# Altium PCB DIOBoard1.PcbDoc
Units mil, origin at the board's own origin, x right, y up, seen from the top; angles counter-clockwise.
Board outline 3937.01 x 5905.51 mil, 2 copper layers (Top Layer, Bottom Layer); 9 components, 86 nets, 54 pads, 7 vias.
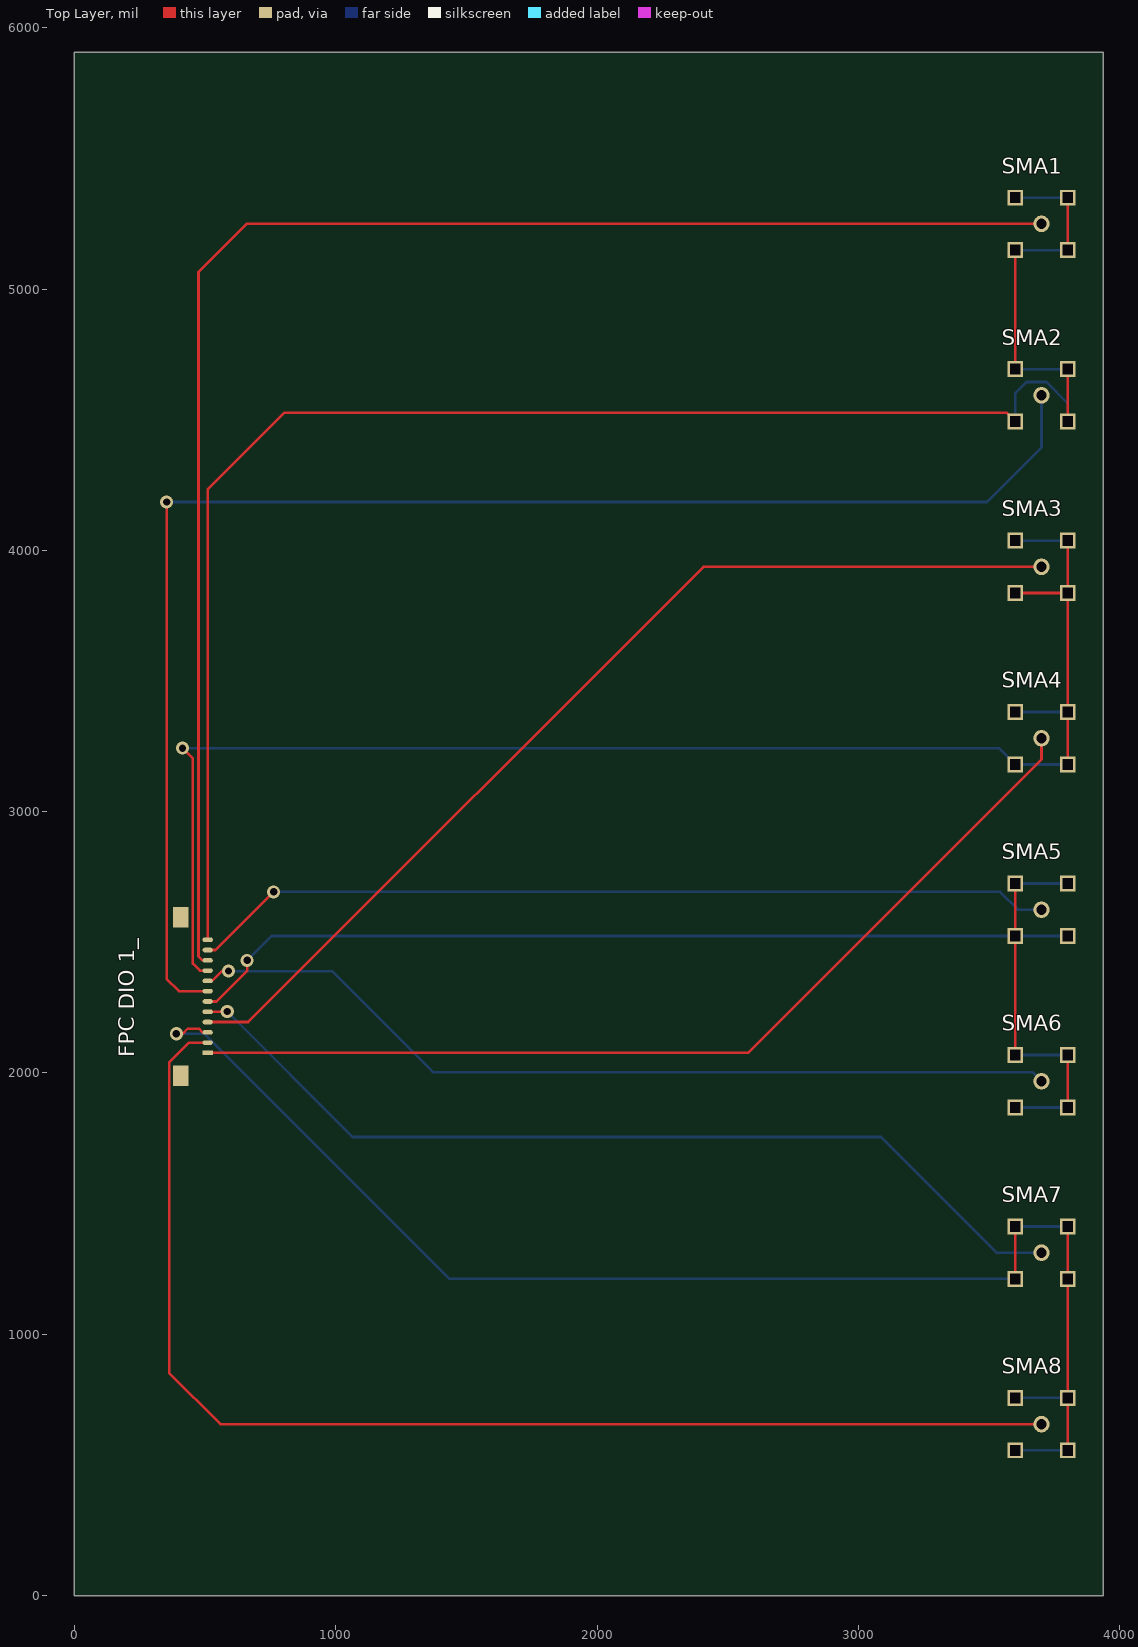
[diagram p0: Top Layer view]
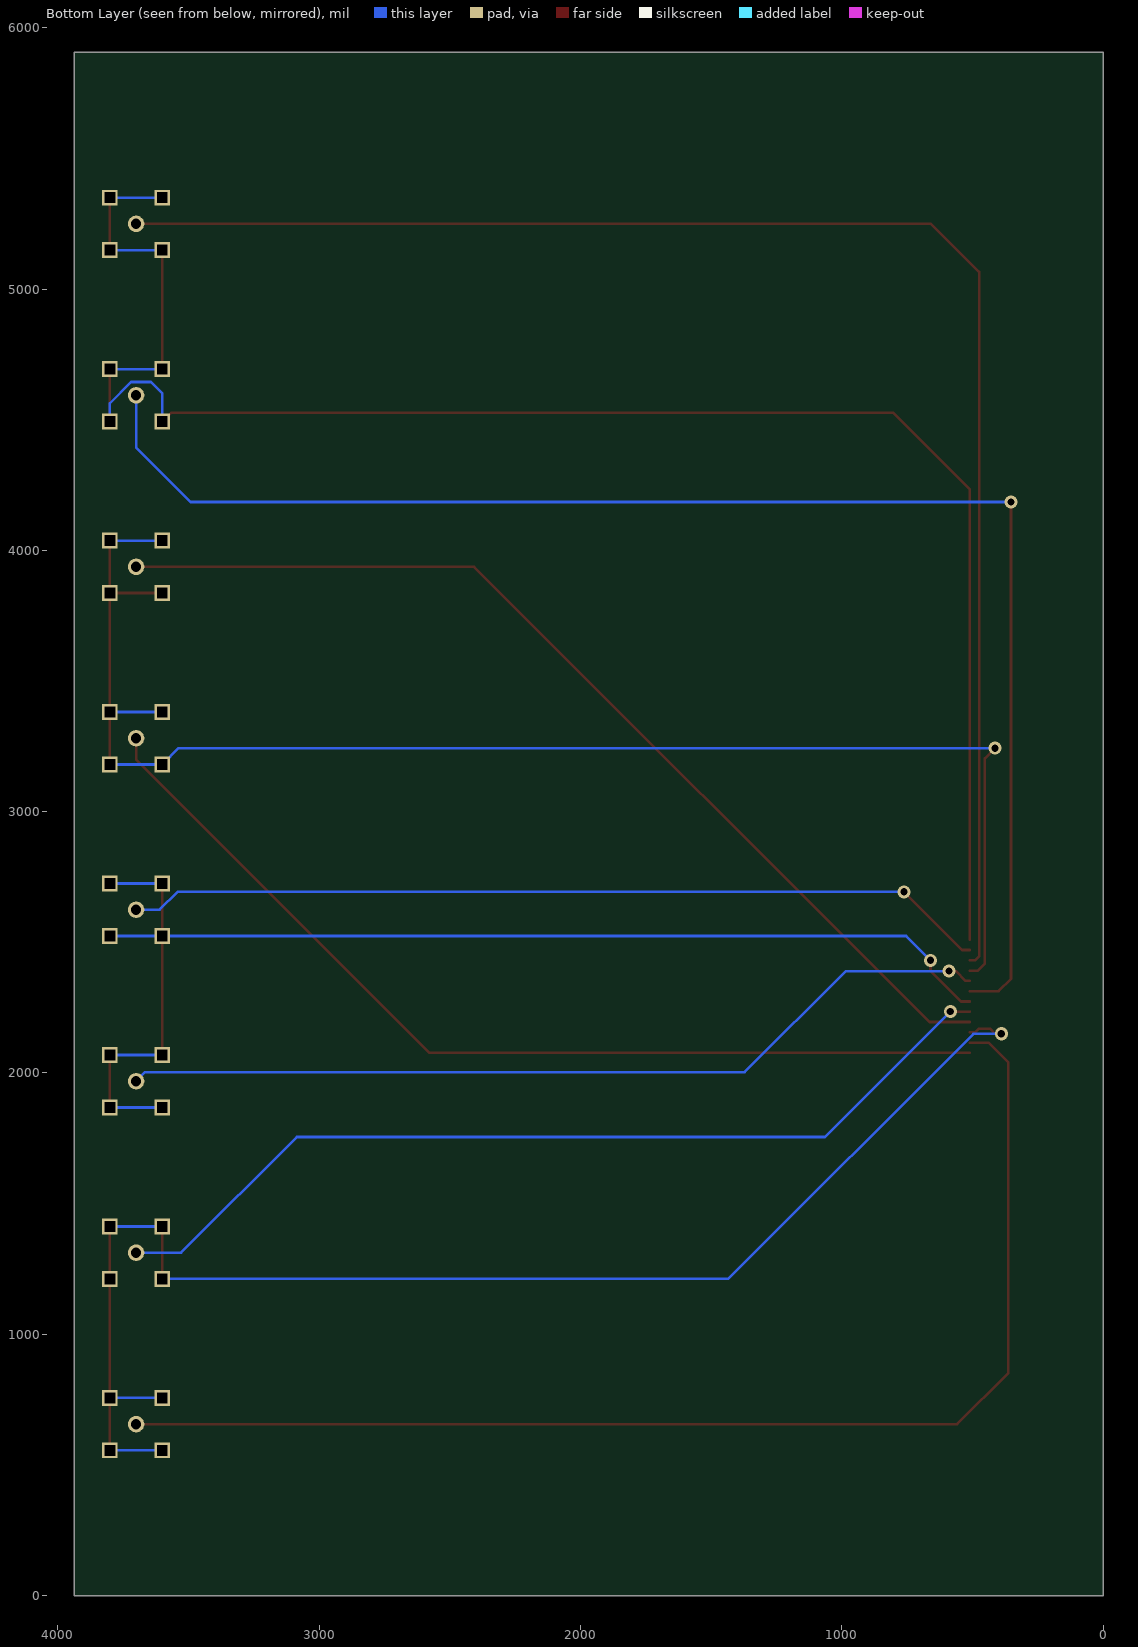
[diagram p1: Bottom Layer view, seen from below]

## Layer stack, top to bottom
Top Solder: solder mask 0.4, Solder Resist, Dk 3.5
Top Layer: signal copper 1.4
Dielectric 1: dielectric 12.6, FR-4, Dk 4.8
Bottom Layer: signal copper 1.4
Bottom Solder: solder mask 0.4, Solder Resist, Dk 3.5

## Board outline
0,0 3937.01,0 3937.01,5905.51 0,5905.51

## Design rules (kind name [scope] priority, off if disabled: settings)
Clearance [All] p1: gap=10 ignorepadtopadclearanceinfootprint=FALSE except(0: Arc-Hole Track-Hole SMDPad-Hole THPad-Hole Via-Hole Fill-Hole Poly-Hole Region-Hole Text-Hole)
PolygonConnect [All] p1: connectstyle=Relief reliefconductorwidth=10 reliefentries=4 polygonreliefangle="90 Angle" airgapwidth=10
RoutingVias [All] p1: holewidth=28 width=50 viastyle="Through Hole" minholewidth=28 minwidth=50 maxholewidth=28 maxwidth=50
SolderMaskExpansion [All] p1: expansion=4
Width [All] p1: maxlimit=10 minlimit=10 preferedwidth=10
30 further rules are at their usual default settings.

## Classes and differential pairs
component class FirstBoard1: "FPC DIO 1_"

## Components (designator, comment, footprint, x,y, rotation, side; value= is the part's Value field where it differs from the comment)
"FPC DIO 1_" "FPC socket 12 pin" "FPC 12pin" 510,2076.77 r180 top
SMA1 "SMA" SMA 3700.79,5249.33 r0 top
SMA2 "SMA" SMA 3700.79,4593.16 r0 top
SMA3 "SMA" SMA 3700.79,3937 r0 top
SMA4 "SMA" SMA 3700.79,3280.83 r0 top
SMA5 "SMA" SMA 3700.79,2624.67 r0 top
SMA6 "SMA" SMA 3700.79,1968.5 r0 top
SMA7 "SMA" SMA 3700.79,1312.34 r0 top
SMA8 "SMA" SMA 3700.79,656.17 r0 top

## Footprints (in the part's own frame and the unit in brackets; to place one, negate y for a bottom-side part, rotate by r counter-clockwise, add the part's x,y. Pads: shape width x height; smd on the part's side, far side on the other; paste and mask are expansions set on the pad)
"FPC 12pin" [mm]
  rect 1x0.45 smd: 1(0,0)
  oval 1x0.45 smd: 2(0,-1) 3(0,-2) 4(0,-3) 5(0,-4) 6(0,-5) 7(0,-6) 8(0,-7) 9(0,-8) 10(0,-9) 11(0,-10) 12(0,-11)
  rect 1.5x2 smd: 13(2.6,-13.2) 14(2.6,2.2)
SMA [mm]
  round 1.6 hole 1: 1(0,0)
  rect 1.524x1.524 hole 1 square: 2(-2.55,-2.55) 2(-2.55,2.55) 2(2.55,-2.55) 2(2.55,2.55)

## Via types
v1: diameter 50, hole 28, Top Layer to Bottom Layer, 7 vias

## Nets (pads, with @x,y where several pads share a name; then routed paths per layer and width w, separated by ;. In a path a pad name is that pad's centre, name@x,y a point inside that pad or via, vN(x,y) a via of type N, cw(c..) or ccw(c..) an arc to the next point about the centre after c; other vN are vias at no path point)
NetC1_1: 
NetC1_2: 
NetC3_1: 
NetC3_2: 
NetC5_1: 
NetC5_2: 
NetC7_1: 
NetC7_2: 
"NetFPC AI1_1": 
"NetFPC AI1_2": 
"NetFPC AI1_3": 
"NetFPC AI1_4": 
"NetFPC AI1_5": 
"NetFPC AI1_6": 
"NetFPC AI1_7": 
"NetFPC AI1_8": 
"NetFPC AI1_9": 
"NetFPC AI1_10": 
"NetFPC AI1_11": 
"NetFPC AI1_12": 
"NetFPC AI2_1": 
"NetFPC AI2_2": 
"NetFPC AI2_3": 
"NetFPC AI2_4": 
"NetFPC AI2_5": 
"NetFPC AI2_6": 
"NetFPC AI2_7": 
"NetFPC AI2_8": 
"NetFPC AI2_9": 
"NetFPC AI2_10": 
"NetFPC AI2_11": 
"NetFPC AI2_12": 
"NetFPC AO_1": 
"NetFPC AO_2": 
"NetFPC AO_3": 
"NetFPC AO_4": 
"NetFPC DIO1_1": 
"NetFPC DIO1_2": 
"NetFPC DIO1_3": 
"NetFPC DIO1_4": 
"NetFPC DIO1_5": 
"NetFPC DIO1_6": 
"NetFPC DIO1_7": 
"NetFPC DIO1_8": 
"NetFPC DIO1_9": 
"NetFPC DIO1_10": 
"NetFPC DIO1_11": 
"NetFPC DIO1_12": 
"NetFPC DIO2_1": 
"NetFPC DIO2_2": 
"NetFPC DIO2_3": 
"NetFPC DIO2_4": 
"NetFPC DIO2_5": 
"NetFPC DIO2_6": 
"NetFPC DIO2_7": 
"NetFPC DIO2_8": 
"NetFPC DIO2_9": 
"NetFPC DIO2_10": 
"NetFPC DIO2_11": 
"NetFPC DIO2_12": 
"NetFPC DIO3_1": 
"NetFPC DIO3_2": 
"NetFPC DIO3_3": 
"NetFPC DIO3_4": 
"NetFPC DIO3_5": 
"NetFPC DIO3_6": 
"NetFPC DIO3_7": 
"NetFPC DIO3_8": 
"NetFPC DIO3_9": 
"NetFPC DIO3_10": 
"NetFPC DIO3_11": 
"NetFPC DIO3_12": 
"NetFPC DIO 1__1": "FPC DIO 1_.1" SMA4.1 | length 3737.1
  Top Layer w10: 510,2076.77 2577.94,2076.77 3700.79,3199.62 SMA4.1
"NetFPC DIO 1__2": "FPC DIO 1_.2" SMA8.1 | length 4785.4
  Top Layer w10: 510,2116.14 439.14,2116.14 363,2040 363,852 558.83,656.17 SMA8.1
"NetFPC DIO 1__3": "FPC DIO 1_.3" SMA7.2 SMA8.2 | length 5392.8
  Top Layer w10: v1(390,2150) 414.49,2150 433.86,2169.37 476.14,2169.37 490,2155.51 510,2155.51 ; SMA7.2@3600.39,1211.94 SMA7.2@3600.39,1412.73 ; SMA8.2@3801.18,555.78 3801.18,756.56 3801.18,1211.94 SMA7.2@3801.18,1412.73
  Bottom Layer w10: v1(390,2150) 497,2150 1435.06,1211.94 SMA7.2@3600.39,1211.94 ; SMA8.2@3600.39,555.78 SMA8.2@3801.18,555.78 ; SMA8.2@3600.39,756.56 SMA8.2@3801.18,756.56 ; SMA7.2@3600.39,1412.73 SMA7.2@3801.18,1412.73
"NetFPC DIO 1__4": "FPC DIO 1_.4" SMA3.1 | length 3912.4
  Top Layer w10: 510,2194.88 664.88,2194.88 2407,3937 SMA3.1
"NetFPC DIO 1__5": "FPC DIO 1_.5" SMA7.1 | length 3573.3
  Top Layer w10: 510,2234.25 510.37,2234.63 584.63,2234.63 v1(585,2235)
  Bottom Layer w10: v1(585,2235) 1065,1755 3086,1755 3528.66,1312.34 SMA7.1
"NetFPC DIO 1__6": "FPC DIO 1_.6" SMA5.2 SMA6.2 | length 4877.7
  Top Layer w10: 510,2273.62 543.62,2273.62 661,2391 v1(661,2431) ; SMA6.2@3600.39,2068.89 3600.39,2524.27 SMA5.2@3600.39,2725.06 ; SMA6.2@3801.18,1868.11 SMA6.2@3801.18,2068.89
  Bottom Layer w10: v1(661,2431) 754.27,2524.27 3600.39,2524.27 SMA5.2@3801.18,2524.27 ; SMA6.2@3600.39,1868.11 SMA6.2@3801.18,1868.11 ; SMA6.2@3600.39,2068.89 SMA6.2@3801.18,2068.89 ; SMA5.2@3600.39,2725.06 SMA5.2@3801.18,2725.06
"NetFPC DIO 1__7": "FPC DIO 1_.7" SMA2.1 | length 5635.1
  Top Layer w10: v1(353,4185) 353,2359.99 400,2312.99 510,2312.99
  Bottom Layer w10: v1(353,4185) 3492,4185 3700.79,4393.79 SMA2.1
"NetFPC DIO 1__8": "FPC DIO 1_.8" SMA6.1 | length 3381
  Top Layer w10: 510,2352.36 526.36,2352.36 564,2390 v1(590,2390)
  Bottom Layer w10: v1(590,2390) 985,2390 1372,2003 3666.29,2003 SMA6.1
"NetFPC DIO 1__9": "FPC DIO 1_.9" SMA3.2 SMA4.2 | length 5781
  Top Layer w10: v1(414,3243) 453,3204 453,2418.73 480,2391.73 510,2391.73 ; SMA3.2@3600.39,3836.61 SMA3.2@3801.18,3836.61 ; SMA4.2@3801.18,3180.44 3801.18,3381.23 SMA3.2@3801.18,3836.61 ; SMA3.2@3801.18,4037.39 SMA3.2@3801.18,3836.61
  Bottom Layer w10: v1(414,3243) 3537.83,3243 3600.39,3180.44 SMA4.2@3801.18,3180.44 ; SMA4.2@3600.39,3381.23 SMA4.2@3801.18,3381.23 ; SMA3.2@3600.39,4037.39 SMA3.2@3801.18,4037.39
"NetFPC DIO 1__10": "FPC DIO 1_.10" SMA1.1 | length 5962.2
  Top Layer w10: 510,2431.1 490,2431.1 475,2446.1 475,5065 659.33,5249.33 SMA1.1
"NetFPC DIO 1__11": "FPC DIO 1_.11" SMA5.1 | length 3311.3
  Top Layer w10: 510,2470.47 540,2470.47 v1(762.53,2693)
  Bottom Layer w10: v1(762.53,2693) 3542,2693 3610.33,2624.67 SMA5.1
"NetFPC DIO 1__12": "FPC DIO 1_.12" SMA1.2 SMA2.2 | length 6838.7
  Top Layer w10: 510,2509.84 510,4233 804,4527 3566.17,4527 SMA2.2@3600.39,4492.77 ; SMA2.2@3600.39,4693.56 SMA1.2@3600.39,5148.94 ; SMA2.2@3801.18,4492.77 SMA2.2@3801.18,4693.56 ; SMA1.2@3801.18,5148.94 SMA1.2@3801.18,5349.72
  Bottom Layer w10: SMA2.2@3600.39,4492.77 3600.39,4600 3644.39,4644 3720,4644 3801.18,4562.82 SMA2.2@3801.18,4492.77 ; SMA2.2@3600.39,4693.56 SMA2.2@3801.18,4693.56 ; SMA1.2@3600.39,5148.94 SMA1.2@3801.18,5148.94 ; SMA1.2@3600.39,5349.72 SMA1.2@3801.18,5349.72
"NetFPC Other_1": 
"NetFPC Other_2": 
pads on no net: "FPC DIO 1_.13" "FPC DIO 1_.14"

## Silkscreen, mask and mechanical layers (free items; w line width, h text height)
Drill Drawing:
  lines w10: 0,0 0,5905.51 3937.01,5905.51 3937.01,0 1968.5,0 0,0
  text "DOI Board 1 V1.0 Ying" at 2650,80 h60